# Altium PCB new.pcbdoc
Units mil, origin at the board's own origin, x right, y up, seen from the top; angles counter-clockwise.
Board outline 1279.91 x 1283.3 mil, 2 copper layers (Top Layer, Bottom Layer); 31 components, 52 nets, 163 pads, 16 vias.
Unrouted connection lines stored in the file: 91.
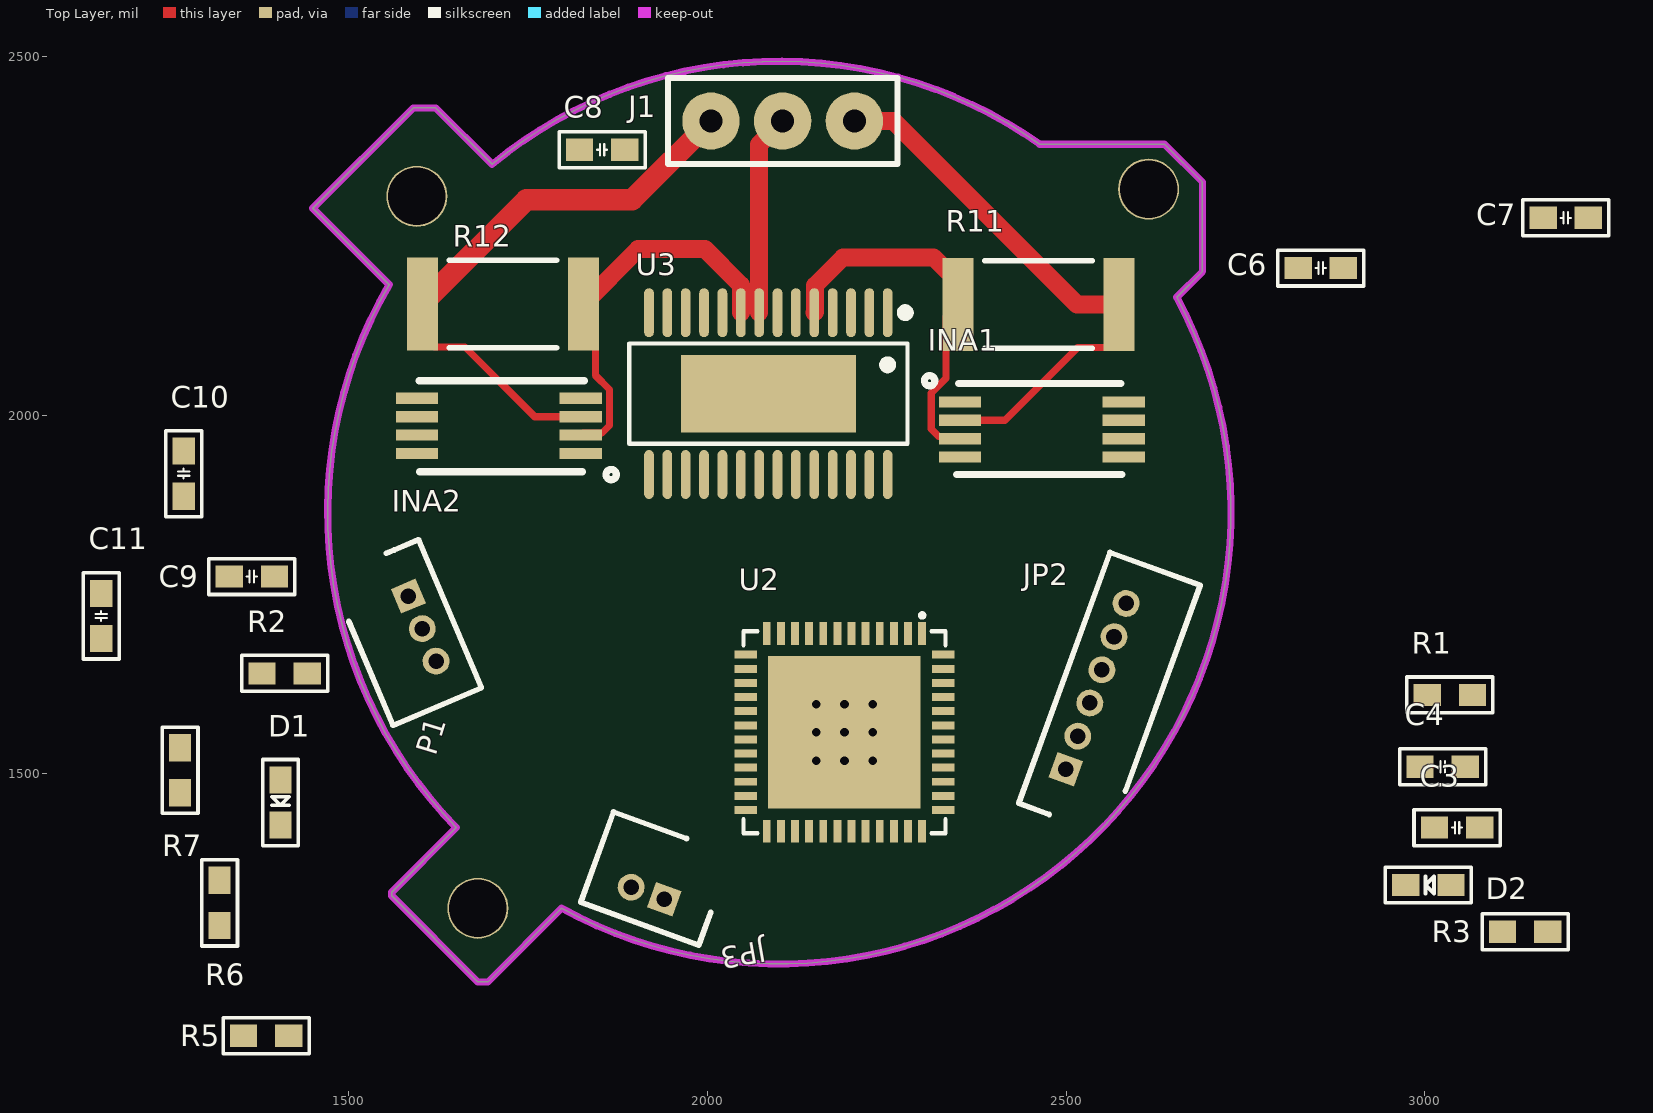
[diagram p0: Top Layer view]
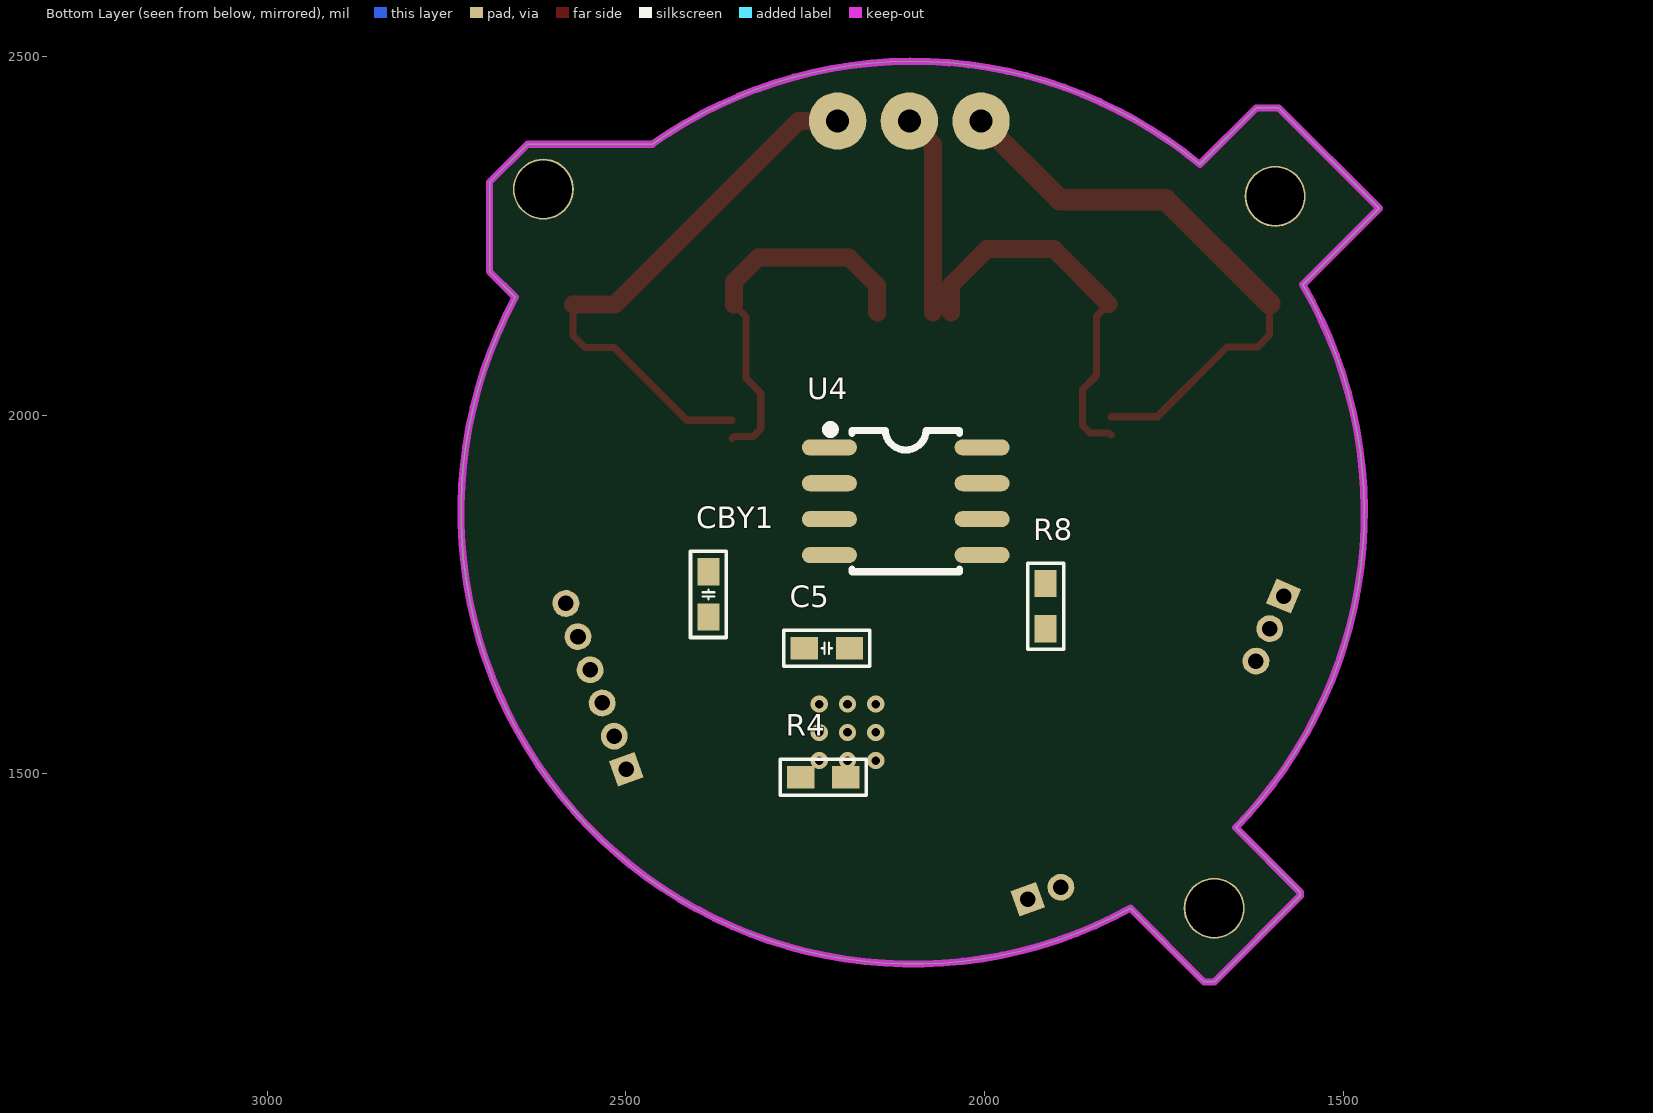
[diagram p1: Bottom Layer view, seen from below]

## Layer stack, top to bottom
Top Solder: solder mask 0.4, Solder Resist, Dk 3.5
Top Layer: signal copper 1.4
Dielectric1: dielectric 12.6, FR-4, Dk 4.8
Bottom Layer: signal copper 1.4
Bottom Solder: solder mask 0.4, Solder Resist, Dk 3.5

## Board outline
1560,1330 1560,1335 1650,1425 cw(c2100,1864.79) 1556.58,2181.99 1556.44,2181.85 1450,2288.3 1590,2428.3 1621.36,2428.3 1700.02,2349.64 1699.92,2349.54 cw(c2100,1864.79) 2463.34,2377.65 2637.35,2377.65 2690,2325 2690,2200 2654.33,2164.33 2654.26,2164.29 cw(c2100,1864.79) 1796.76,1312.57 1694.19,1210 1680,1210

## Design rules (kind name [scope] priority, off if disabled: settings)
Clearance [All] p1: gap=5.6 ignorepadtopadclearanceinfootprint=FALSE
HoleToHoleClearance [All] p1: gap=0 allowstackedmicrovias=TRUE
MinimumSolderMaskSliver [All] p1: minsoldermaskwidth=0
PolygonConnect [All] p1: connectstyle=Relief reliefconductorwidth=10 reliefentries=4 polygonreliefangle="90 Angle" airgapwidth=10
RoutingVias [All] p1: holewidth=12 width=24 viastyle="Through Hole" minholewidth=28 minwidth=50 maxholewidth=28 maxwidth=50
SilkToSilkClearance [All] p1: silktosilkclearance=0
SilkToSolderMaskClearance [IsPad] p1: minsilkscreentomaskgap=0 clearancetoexposedcopper=TRUE
SolderMaskExpansion [All] p1: expansion=4
Width [All] p1: maxlimit=50 minlimit=10 preferedwidth=25
26 further rules are at their usual default settings.

## Components (designator, comment, footprint, x,y, rotation, side; value= is the part's Value field where it differs from the comment)
C3 "10uF" 0603C 3045,1425 r180 top
C4 "100nF" 0603C 3025,1510 r180 top
C5 "1uF" 0603C 2220,1674.95 r180 bottom
C6 "10nF" 0603C 2855,2205 r0 top
C7 "100nF" 0603C 3196.5,2275 r180 top
C8 "10uF" 0603C 1853.34,2370 r0 top
C9 "1uF" 0603C 1365,1775 r180 top
C10 "100nF" 0603C 1270,1918.5 r90 top
C11 "10uF (106) 10% 10V" 0603C 1155,1720 r90 top
CBY1 "0.1μF" 0603C 2385,1750 r90 bottom
D1 "蓝灯 0603" 0603_diode 1405,1460 r270 top
D2 "蓝灯 0603" 0603_diode 3005,1345 r180 top
INA1 "INA240A2" INA240 2466.37,1980 r270 top
INA2 "INA240A1" INA240 1709.43,1985 r90 top
J1 "90120-0763" 10.7MHZ 2205,2410 r180 top
JP2 "SPI1" SHDR6 2499.5,1506.27 r70 top
JP3 "Header 2" SHDR2 1940,1325 r340 top
P1 "TB002-500-03BE" SHDR3 1583.37,1747.7 r113 top
R1 "0Ω (0R0) ±1%" 0603R 3035,1610 r0 top
R2 "2KΩ" 0603R 1410.69,1640 r0 top
R3 "2KΩ" 0603R 3140.01,1280 r180 top
R4 "10K" 0603R 2225,1495.05 r0 bottom
R5 "10K" 0603R 1385,1135 r0 top
R6 "10KΩ" 0603 1320,1320 r270 top
R7 "10K" 0603R 1265,1505 r270 top
R8 "1K" 0603 1915,1733.73 r270 bottom
R11 "10mOhm" RESC6332 2461.66,2154.29 r0 top
R12 "10mOhm" RESC6332 1715,2155 r180 top value=1K
U2 "ESP32-PICO-D4" QFN-48_L7.0-W7.0-P0.50-BL-EP5.4 2191.1,1546.86 r180 top
U3 "DRV8313PWPR" HTSSOP-28_L9.8-W4.5-P0.65-LS6.6-BL-EP 2085,2030 r180 top
U4 "AS5600-ASOM" SOIC-8_L5.0-W4.0-P1.27-LS6.0-BL 2110,1880 r270 bottom

## Footprints (in the part's own frame and the unit in brackets; to place one, negate y for a bottom-side part, rotate by r counter-clockwise, add the part's x,y. Pads: shape width x height; smd on the part's side, far side on the other; paste and mask are expansions set on the pad)
10.7MHZ [mil]
  round 80 hole 32: 1(0,0) 2(200,0) 3(100,0)
  silkscreen extent -60,-60 260,60
0603 [mil]
  rect 38x31 smd: 1(-31.5,0) 2(31.5,0)
  silkscreen extent -60,-25 60,25
0603_diode [mil]
  rect 38x31 smd: 1(-31.5,0) 2(31.5,0)
  silkscreen extent -60,-25 60,25
0603C [mil]
  rect 38x31 smd: 1(-31.5,0) 2(31.5,0)
  silkscreen extent -60,-25 60,25
0603R [mil]
  rect 38x31 smd: 1(-31.5,0) 2(31.5,0)
  silkscreen extent -60,-25 60,25
HTSSOP-28_L9.8-W4.5-P0.65-LS6.6-BL-EP [mil]
  oval 13.5x68.2 smd mask+2: 1(-166.3,-112.8) 2(-140.7,-112.8) 3(-115.2,-112.8) 4(-89.6,-112.8) 5(-64,-112.8) 6(-38.4,-112.8) 7(-12.8,-112.8) 8(12.8,-112.8) 9(38.4,-112.8) 10(64,-112.8) 11(89.6,-112.8) 12(115.2,-112.8) 13(140.8,-112.8) 14(166.3,-112.8) 15(166.3,112.8) 16(140.8,112.8) 17(115.2,112.8) 18(89.6,112.8) 19(64,112.8) 20(38.4,112.8) 21(12.8,112.8) 22(-12.8,112.8) 23(-38.4,112.8) 24(-64,112.8) 25(-89.6,112.8) 26(-115.2,112.8) 27(-140.7,112.8) 28(-166.3,112.8)
  rect 244.1x108.3 smd mask+2: 29(0,0)
  silkscreen extent -197,-119 194,70
INA240 [mm]
  rect 0.4x1.5 smd mask+0.05: 1(-0.975,-2.9) 2(-0.325,-2.9) 3(0.325,-2.9) 4(0.975,-2.9) 5(0.975,2.9) 6(0.325,2.9) 7(-0.325,2.9) 8(-0.975,2.9)
  silkscreen extent -1.91,-4.16 1.6,2.82, body extent -1.5,-3.3 1.5,3.3, height 1.2
QFN-48_L7.0-W7.0-P0.50-BL-EP5.4 [mm]
  rect 0.28x0.8 smd: 1(-2.75,-3.778) 2(-2.25,-3.778) 3(-1.75,-3.778) 4(-1.25,-3.778) 5(-0.75,-3.778) 6(-0.25,-3.778) 7(0.25,-3.778) 8(0.75,-3.778) 9(1.25,-3.778) 10(1.75,-3.778) 11(2.25,-3.778) 12(2.75,-3.778) 25(2.75,3.222) 26(2.25,3.222) 27(1.75,3.222) 28(1.25,3.222) 29(0.75,3.222) 30(0.25,3.222) 31(-0.25,3.222) 32(-0.75,3.222) 33(-1.25,3.222) 34(-1.75,3.222) 35(-2.25,3.222) 36(-2.75,3.222)
  rect 0.8x0.28 smd: 13(3.5,-3.027) 14(3.5,-2.527) 15(3.5,-2.027) 16(3.5,-1.527) 17(3.5,-1.027) 18(3.5,-0.527) 19(3.5,-0.027) 20(3.5,0.473) 21(3.5,0.973) 22(3.5,1.473) 23(3.5,1.973) 24(3.5,2.473) 37(-3.5,2.473) 38(-3.5,1.972) 39(-3.5,1.473) 40(-3.5,0.972) 41(-3.5,0.473) 42(-3.5,-0.028) 43(-3.5,-0.527) 44(-3.5,-1.028) 45(-3.5,-1.527) 46(-3.5,-2.028) 47(-3.5,-2.527) 48(-3.5,-3.028)
  rect 5.4x5.4 smd: 49(0,-0.278)
  silkscreen extent -3.58,-4.49 3.58,3.3
RESC6332 [mm] "Chip Resistor, Body 6.3x3.2mm, IPC High Density"
  rect 1.1x3.3 smd: 1(-2.85,0) 2(2.85,0)
  silkscreen extent -1.9,-1.55 1.9,1.55, body extent -3.22,-1.68 3.22,1.68, height 0.9
SHDR2 [mm]
  rect 0.95x0.95 hole 0.55: 1(0,0)
  round 0.95 hole 0.55: 2(-1.25,0)
  silkscreen extent -2.75,-1.11 1.7,2.29
SHDR3 [mm]
  rect 0.95x0.95 hole 0.55: 1(0,0)
  round 0.95 hole 0.55: 2(-1.25,0) 3(-2.5,0)
  silkscreen extent -4,-1.11 1.7,2.29
SHDR6 [mm]
  rect 0.95x0.95 hole 0.55: 1(0,0)
  round 0.95 hole 0.55: 2(1.25,0) 3(2.5,0) 4(3.75,0) 5(5,0) 6(6.25,0)
  silkscreen extent -1.7,-2.25 7.75,1.15
SOIC-8_L5.0-W4.0-P1.27-LS6.0-BL [mil]
  oval 22.38x76.78 smd mask+2: 1(-75,-106.5) 2(-25,-106.5) 3(25,-106.5) 4(75,-106.5) 5(75,106.5) 6(25,106.5) 7(-25,106.5) 8(-75,106.5)
  silkscreen extent -106,-111 98,75

## Part data
C3 C8 C11: SuppliersPartNumber=C19702, ComponentLink1Description=供应商链接, ComponentLink1URL=http://www.szlcsc.com/product/details_20411.html, Supplier=LC
C4 C7 C10: SuppliersPartNumber=C14663, ComponentLink1Description=供应商链接, ComponentLink1URL=http://www.szlcsc.com/product/details_15331.html, Supplier=LC
C5 C9: SuppliersPartNumber=C15849, ComponentLink1Description=供应商链接, ComponentLink1URL=http://www.szlcsc.com/product/details_16531.html, Supplier=LC
C6: SuppliersPartNumber=C57112, ComponentLink1Description=供应商链接, ComponentLink1URL=http://www.szlcsc.com/product/details_58143.html, Supplier=LC
CBY1: library part CAP_1
D1 D2: SuppliersPartNumber=C72041, ComponentLink1Description=供应商链接, ComponentLink1URL=http://www.szlcsc.com/product/details_73150.html, Supplier=LC
INA1 INA2: library part INA240, Supplier Part Number 1=595-INA240A2PWR, Supplier 1=Mouser
J1: Current Rating=3A, Manufacturer=Molex, Temperature="-55°C to +125°C", Temperature Range High=+125°C, Temperature Range Low=-55°C, Voltage Rating=350V, Automotive=No, Category=Conn, ComponentLink2Description=Datasheet, ComponentLink2URL=https://www.molex.com/webdocs/datasheets/pdf/en-us/0901200763_PCB_HEADERS.pdf, Conn Gender=Male, Conn Orientation=Vertical, Contact Material=Gold,Nickel, Device Class L1=Connectors, Device Class L2="Headers and Wire Housings", Device Class L3=unset, Digikey Description="CONN HEADER VERT 3POS 2.54MM", Footprint Url=https://www.molex.com/pdm_docs/sd/901200763_sd.pdf, Height=5.8mm, Lead Free=Yes, Manufacturer Part Number=90120-0763, Mouser Description="Board-To-Board Connector, C-Grid III 90120 Series, Through Hole, Header, 3, 2.54 mm", Number Of Contacts=3, Number Of Rows=1, Octopart=https://octopart.com/90120-0763-molex-655433, Pitch=2.54mm, RoHS=TRUE
JP2: library part "HEADER 6"
JP3: "Header, 2-Pin", LatestRevisionDate=17-Jul-2002, LatestRevisionNote="Re-released for DXP Platform.", Publisher="Altium Limited"
P1: Supplier Part Number 1=490-TB002-500-03BE, Supplier 1=Mouser
R1: SuppliersPartNumber=C21189, ComponentLink1Description=供应商链接, ComponentLink1URL=http://www.szlcsc.com/product/details_21903.html, Supplier=LC
R2 R3: SuppliersPartNumber=C22975, ComponentLink1Description=供应商链接, ComponentLink1URL=http://www.szlcsc.com/product/details_23702.html, Supplier=LC
R4 R5 R6 R7: SuppliersPartNumber=C25804, ComponentLink1Description=供应商链接, ComponentLink1URL=http://www.szlcsc.com/product/details_26547.html, Supplier=LC
R8: SuppliersPartNumber=C21190, ComponentLink1Description=供应商链接, ComponentLink1URL=http://www.szlcsc.com/product/details_21904.html, Supplier=LC
R11: library part RES2
R12: library part Res1, "Resistor", Ordered by=Subcon, Published=8-Jun-2000, Publisher="Altium Limited", Revision="July-2002: Re-released for DXP Platform."

## Free pads (board coordinates)
  round 85 hole 80: 8(1595,2305) 8(1680,1312.57) 8(2615,2315)

## Via types
v1: diameter 24.02, hole 12, Top Layer to Bottom Layer, 9 vias
v2: diameter 24, hole 12, Top Layer to Bottom Layer, 7 vias

## Nets (pads, with @x,y where several pads share a name; then routed paths per layer and width w, separated by ;. In a path a pad name is that pad's centre, name@x,y a point inside that pad or via, vN(x,y) a via of type N, cw(c..) or ccw(c..) an arc to the next point about the centre after c; other vN are vias at no path point)
EN: C5.2 JP2.3 R4.1 U2.9
ENA: U2.36 U3.22 U3.24 U3.26
FAULT: R5.2 U2.13 U3.18
FLASH_CLK: U2.31
FLASH_CS: U2.25
FLASH_SD0: U2.27
FLASH_SD1: U2.33
FLASH_SD2: U2.30
FLASH_SD3: U2.32
GND: C3.1 C4.1 C5.1 C8.1 C9.1 C10.1 C11.1 CBY1.2 D1.2 D2.2 INA1.1 INA1.4 INA1.7 INA2.1 INA2.4 INA2.7 JP2.1 P1.2 R8.2 U2.49 U3.6 U3.7 U3.10 U3.12 U3.13 U3.14 U3.19 U3.20 U3.28 U4.4 U4.8
  other v1: 2151.72,1518.41 2191.1,1518.41 2230.46,1518.41 2151.73,1557.78 2191.1,1557.78 2230.47,1557.78 2151.73,1597.16 2191.1,1597.16 2230.47,1597.16
  other v2: 2151.72,1518.41 2230.46,1518.41 2151.73,1557.78 2230.47,1557.78 2151.73,1597.16 2191.1,1597.16 2230.47,1597.16
GPIO0: JP2.2 U2.23
GPIO2: INA1.8 U2.22
GPIO4: INA2.8 U2.24
GPIO5: U2.34
GPIO9: U2.28
GPIO10: U2.29
GPIO12: U2.18
GPIO13: JP3.2 U2.20
GPIO14: U2.17
GPIO15: JP3.1 U2.21
GPIO18: U2.35
GPIO19: U2.38 U3.27
GPIO21: U2.42 U3.23
GPIO22: U2.39 U3.25
GPIO25: R7.1 U2.14 U4.6
GPIO26: R6.1 U2.15 U4.7
GPIO27: R3.2 U2.16
GPIO32: U2.12 U3.16
GPIO34: U2.10 U3.17
GPIO35: U2.11
GPIO37: U2.7
GPIO38: U2.6
NetC6_1: C6.1 U3.2
NetC6_2: C6.2 U3.1
NetC7_1: C7.1 U3.3
NetC9_2: C9.2 R5.1 U3.15
NetD1_A: D1.1 R2.1
NetD2_A: D2.1 R3.1
NetR8_1: R8.1 U4.5
NetU2_2: U2.2
RXD: JP2.5 U2.40
SENSOR_VN: U2.8
SENSOR_VP: U2.5
TXD: JP2.4 U2.41
U: INA1.2 J1.1 R11.2 | length 788.7
  Top Layer w10: INA1.2 2414.76,1992.8 2516.3,2094.33 2557.21,2094.33 2573.87,2110.98 R11.2
  Top Layer w25: J1.1 2259.46,2410 2515.17,2154.29 R11.2
U_CS: INA1.3 R11.1 U3.5 | length 534.6
  Top Layer w10: R11.1 2332.8,2137.64 2332.8,2051.39 2312.07,2030.65 2312.07,1980.53 2322.52,1970.08 2349.32,1970.08 INA1.3
  Top Layer w25: U3.5 2149.75,2143.55 2149.75,2180.44 2189.31,2220 2315.3,2220 2349.46,2185.85 R11.1
V: J1.3 U3.8 | length 280.8
  Top Layer w25: U3.8 2072.2,2377.2 J1.3
VDD3V3: C10.2 C11.2 CBY1.1 INA1.5 INA1.6 INA2.5 INA2.6 JP2.6 P1.3 R1.2 R2.2 R6.2 R7.2 U4.1 U4.2
VDD33: C3.2 C4.2 R1.1 R4.2 U2.1 U2.3 U2.4 U2.19 U2.37 U2.43 U2.46
VIN: C7.2 C8.2 P1.1 U3.4 U3.11
W: INA2.3 J1.2 R12.2 | length 819.1
  Top Layer w10: R12.2 1602.8,2111.69 1619.45,2095.04 1662.08,2095.04 1759.32,1997.8 INA2.3
  Top Layer w30: R12.2 1747.8,2300 1895,2300 J1.2
W_CS: INA2.2 R12.1 U3.9 | length 540.7
  Top Layer w10: INA2.2 1826.48,1975.08 1853.28,1975.08 1863.73,1985.53 1863.73,2035.65 1843.86,2055.52 1843.86,2138.35 R12.1
  Top Layer w25: R12.1 1903.6,2231.4 1996.75,2231.4 2046.6,2181.55 U3.9
pads on no net: U2.26 U2.44 U2.45 U2.47 U2.48 U3.21 U3.29 U4.3

## Keep-outs
Keep-Out Layer:
  lines w10: 1556.44,2181.85 1450,2288.3 1590,2428.3 1621.36,2428.3 1700.02,2349.64 ; 1556.58,2181.99 ccw(c2100,1864.79) 1650,1425 1560,1335 1560,1330 1680,1210 1694.19,1210 1796.76,1312.57 ccw(c2100,1864.79) 2654.26,2164.29 ; 1699.92,2349.54 cw(c2100,1864.79) 2463.34,2377.65 2637.35,2377.65 2690,2325 2690,2200 2654.33,2164.33